# Altium PCB PCB1.PcbDoc
Units mil, origin at the board's own origin, x right, y up, seen from the top; angles counter-clockwise.
Board outline 740 x 2460 mil, 2 copper layers (Top Layer, Bottom Layer), stack 64.961 mil thick; 3 components, 47 nets, 97 pads, 0 vias.
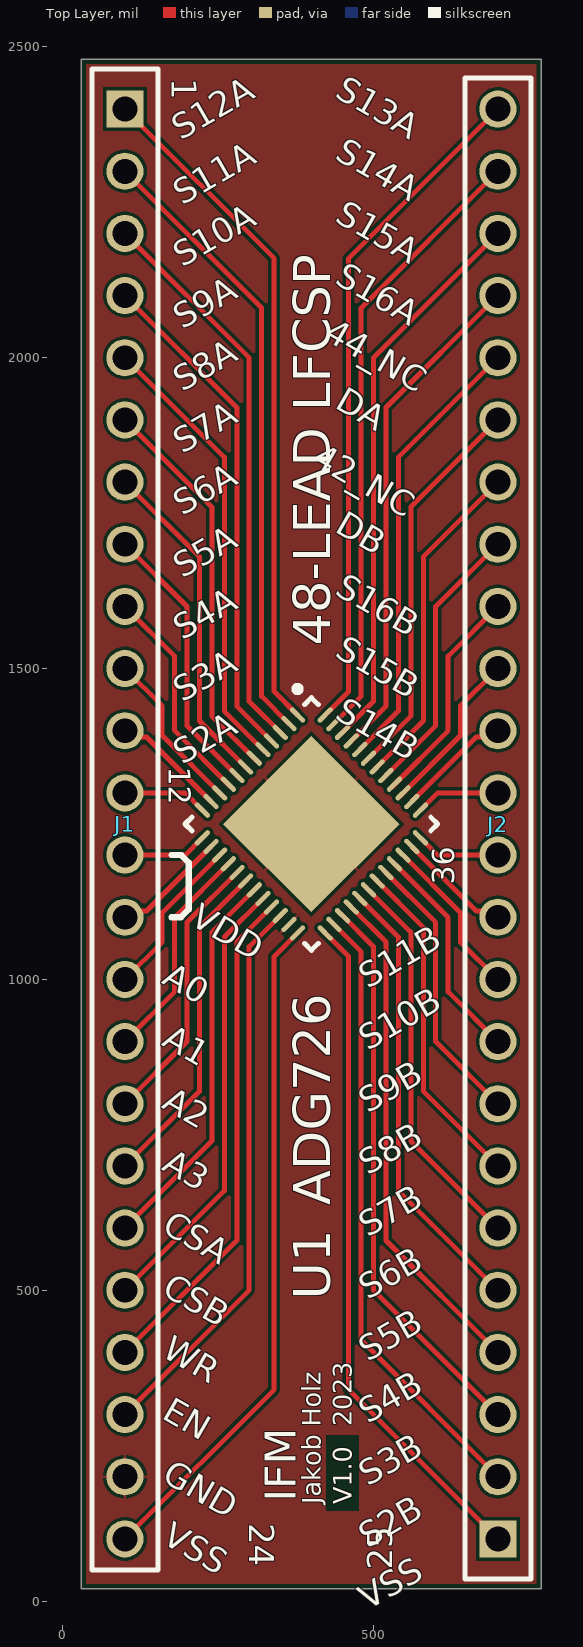
[diagram p0: Top Layer view]
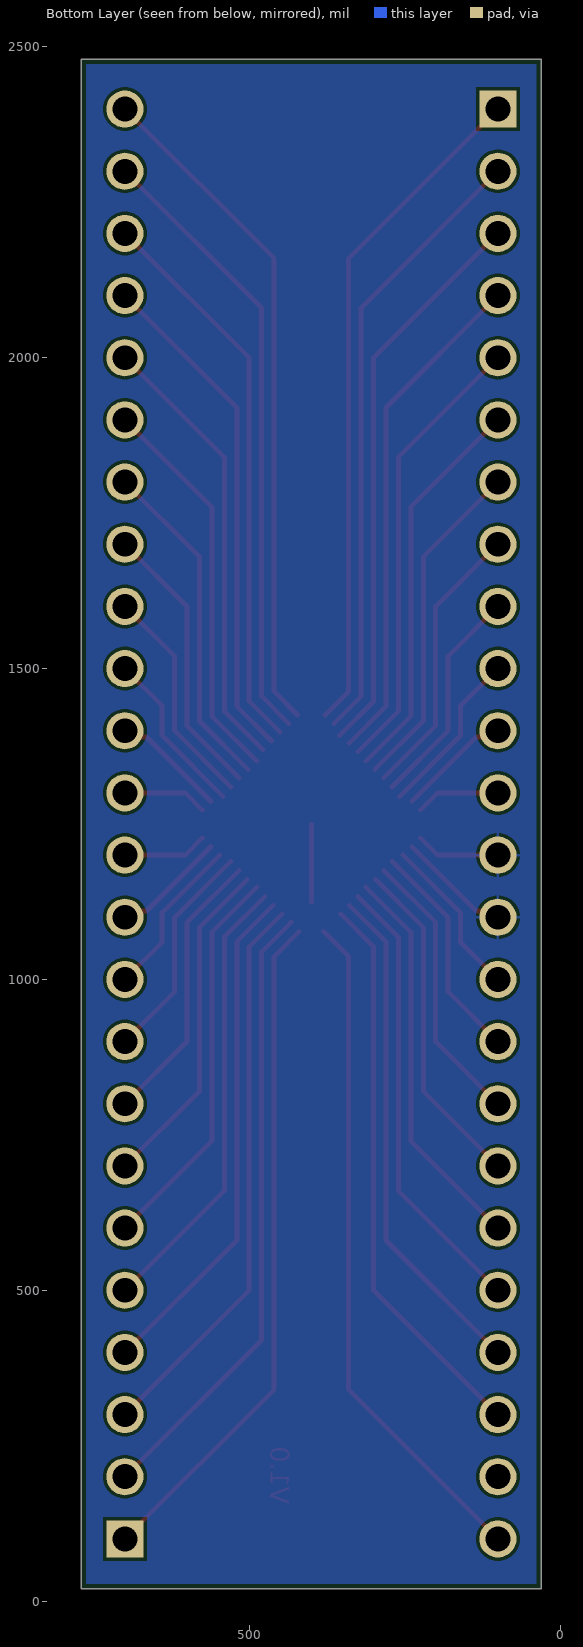
[diagram p1: Bottom Layer view, seen from below]

## Layer stack, top to bottom
Top Solder: solder mask 0.5, Solder Resist, Dk 3.8
Top Layer: signal copper 2.9528
Dielectric: core 59.0551, FR-4, Dk 4.5
Bottom Layer: signal copper 2.9528
Bottom Solder: solder mask 0.5, Solder Resist, Dk 3.8

## Board outline
30,20 770,20 770,2480 30,2480

## Design rules (kind name [scope] priority, off if disabled: settings)
BoardOutlineClearance [All] p1: gap=7.87 ignorepadtopadclearanceinfootprint=FALSE
Clearance [All] p1: gap=5 ignorepadtopadclearanceinfootprint=FALSE except(9.84: Arc-Hole Track-Hole SMDPad-Hole THPad-Hole Via-Hole Fill-Hole Poly-Hole Region-Hole Text-Hole)
ComponentClearance [All] p1: gap=5 collisioncheckmode=3 verticalgap=5 showdistances=TRUE
DiffPairsRouting [All] p1: maxlimit=10 minlimit=5 mostfreqgap=5 toplayer_minwidth=5 toplayer_maxwidth=1000 toplayer_prefwidth=5 bottomlayer_minwidth=5 bottomlayer_maxwidth=1000 bottomlayer_prefwidth=5 maxuncoupledlength=500
Height [All] p1: minheight=0 maxheight=71497.94 prefheight=500
HoleSize [All] p1: absolutevalues=TRUE maxlimit=248.03 minlimit=11.81 maxpercent=80.000 minpercent=20.000
HoleToHoleClearance [All] p1: gap=9.84 allowstackedmicrovias=FALSE
MinimumAnnularRing [All] p1: minimumring=3
MinimumSolderMaskSliver [All] p1: minsoldermaskwidth=0
PlaneClearance [All] p1: clearance=5
PlaneConnect PlaneConnectPowerPads [InPadClass('PowerPads')] p1: planeconnectstyle=Direct reliefexpansion=20 reliefentries=4 reliefconductorwidth=10 reliefairgap=10
PlaneConnect [All] p2: pad.planeconnectstyle=Relief pad.reliefexpansion=11.81 pad.reliefentries=4 pad.reliefconductorwidth=5 pad.reliefairgap=5 via.planeconnectstyle=Direct via.reliefexpansion=11.81 via.reliefentries=4 via.reliefconductorwidth=5 via.reliefairgap=5
PolygonConnect PolygonConnectPowerPads [All vs (InPadClass('PowerPads'))] p1: connectstyle=Direct reliefconductorwidth=10 reliefentries=4 polygonreliefangle="90 Angle" airgapwidth=10
PolygonConnect [All] p2: thpad.connectstyle=Relief thpad.reliefconductorwidth=5 thpad.reliefentries=4 thpad.polygonreliefangle="90 Angle" thpad.airgapwidth=5 smdpad.connectstyle=Relief smdpad.reliefconductorwidth=5 smdpad.reliefentries=4 smdpad.polygonreliefangle="90 Angle" smdpad.airgapwidth=5 via.connectstyle=Direct via.reliefconductorwidth=5 via.reliefentries=4 via.polygonreliefangle="90 Angle" via.airgapwidth=5
RoutingVias [All] p1: holewidth=11.81 width=23.62 viastyle="Through Hole" minholewidth=11.81 minwidth=23.62 maxholewidth=23.62 maxwidth=259.84
SilkToSilkClearance [All] p1: silktosilkclearance=0
SilkToSolderMaskClearance [IsPad] p1: minsilkscreentomaskgap=5 clearancetoexposedcopper=TRUE
SolderMaskExpansion [All] p1: expansion=2.95 istentingtop=FALSE
Width [All] p1: maxlimit=1000 minlimit=5 preferedwidth=5 minimp=50.000000 maximp=50.000000 favimp=50.000000
20 further rules are at their usual default settings.

## Components (designator, comment, footprint, x,y, rotation, side; value= is the part's Value field where it differs from the comment)
J1 "61303211821" 61303211821 100,2400 r270 top
J2 "61303211821" 61303211821 700,100 r90 top
U1 "ADG726BCPZ" ADI-CP-48-1_M 400,1250 r315 top

## Footprints (in the part's own frame and the unit in brackets; to place one, negate y for a bottom-side part, rotate by r counter-clockwise, add the part's x,y. Pads: shape width x height; smd on the part's side, far side on the other; paste and mask are expansions set on the pad)
61303211821 [mm] "Socket Header, Pitch 2.54 mm, THT, Vertical, single row, 32p"
  rect 1.52x1.52 hole 1.02: 1(0,0)
  round 1.52 hole 1.02: 2(2.54,0) 3(5.08,0) 4(7.62,0) 5(10.16,0) 6(12.7,0) 7(15.24,0) 8(17.78,0) 9(20.32,0) 10(22.86,0) 11(25.4,0) 12(27.94,0) 13(30.48,0) 14(33.02,0) 15(35.56,0) 16(38.1,0) 17(40.64,0) 18(43.18,0) 19(45.72,0) 20(48.26,0) 21(50.8,0) 22(53.34,0) 23(55.88,0) 24(58.42,0)
  silkscreen extent -1.65,-1.35 59.69,1.35
ADI-CP-48-1_M [mm] "QFN, 48-Leads, Body 7x7mm, Pitch 0.5mm, IPC Low Density"
  oval 0.8x0.2 smd: 1(-3.55,2.75) 2(-3.55,2.25) 3(-3.55,1.75) 4(-3.55,1.25) 5(-3.55,0.75) 6(-3.55,0.25) 7(-3.55,-0.25) 8(-3.55,-0.75) 9(-3.55,-1.25) 10(-3.55,-1.75) 11(-3.55,-2.25) 12(-3.55,-2.75) 25(3.55,-2.75) 26(3.55,-2.25) 27(3.55,-1.75) 28(3.55,-1.25) 29(3.55,-0.75) 30(3.55,-0.25) 31(3.55,0.25) 32(3.55,0.75) 33(3.55,1.25) 34(3.55,1.75) 35(3.55,2.25) 36(3.55,2.75)
  oval 0.2x0.8 smd: 13(-2.75,-3.55) 14(-2.25,-3.55) 15(-1.75,-3.55) 16(-1.25,-3.55) 17(-0.75,-3.55) 18(-0.25,-3.55) 19(0.25,-3.55) 20(0.75,-3.55) 21(1.25,-3.55) 22(1.75,-3.55) 23(2.25,-3.55) 24(2.75,-3.55) 37(2.75,3.55) 38(2.25,3.55) 39(1.75,3.55) 40(1.25,3.55) 41(0.75,3.55) 42(0.25,3.55) 43(-0.25,3.55) 44(-0.75,3.55) 45(-1.25,3.55) 46(-1.75,3.55) 47(-2.25,3.55) 48(-2.75,3.55)
  rect 5.1x5.1 smd: 49(0,0)
  silkscreen extent -4.42,-3.65 3.65,3.65, body extent -3.5,-3.5 3.5,3.5, height 1

## Part data
J1 J2: library part "Header 1x24", "THT Vertical Socket Header WR-PHD, Pitch 2.54 mm, Single Row, 32 pins", Contact Resistance=20mOhm, Manufacturer="Wurth Elektronik", Operating Temperature=-40to125degC, Rated Current=3A, Withstanding Voltage=500VAC, Working Voltage=250VAC, Datasheet URL=https://katalog.we-online.de/em/datasheet/6130xx11821.pdf, Gender=Female, Manufacturer URL=http://www.we-online.de, Mounting Technology=THT, Orientation=Vertical, Package Reference=61303211821, Packaging=Tray, Part Number=61303211821, Pin Number=32, Pitch=2.54mm, Publisher=WurthElektronik, Row Number=Single
U1: library part CMP-0798-00018-1, "1.8 to 5.5 V / +/-2.5 V, 4 Ohm, 16-Channel Analog Multiplexer, -40 to 85 degC, 48-pin QFN (CP-48-1), Tray", Manufacturer="Analog Devices", Bandwidth (Hz)=34M, Code_JEDEC=MO-220-VKKD-2, ComponentLink1Description="Manufacturer URL", ComponentLink1URL=http://www.analog.com/en/index.html, ComponentLink2Description=Datasheet, ComponentLink2URL=http://www.analog.com/static/imported-files/data_sheets/ADG726_732.pdf, ComponentLink3Description="Package Specification", ComponentLink3URL=http:/www.analog.com/static/imported-files/packages/PKG_PDF/LFCSP(CP)/CP-48/CP_48_1.pdf, DatasheetVersion="Rev. 0", Max Analog Signal Range="Vss to Vdd", Mounting Technology="Surface Mount", PackageDescription="48-Pin Lead Frame Chip Scale Package, Body 7 x 7 mm, Pitch 0.5 mm", PackageReference=CP-48-1, Packing=Tray, PartNumber=ADG726BCPZ, Ron (ohms)=4, Supply V Guar Performance="Dual_(+/-2.5V), Single_(+3V), Single_(+5V)", t transition (s)=23n

## Nets (pads, with @x,y where several pads share a name; then routed paths per layer and width w, separated by ;. In a path a pad name is that pad's centre, name@x,y a point inside that pad or via, vN(x,y) a via of type N, cw(c..) or ccw(c..) an arc to the next point about the centre after c; other vN are vias at no path point)
42_NC: J2.18 U1.42 | length 544
  Top Layer w8: U1.42@502.2,1337.95 580,1415.75 580,1680 J2.18
44_NC: J2.20 U1.44 | length 722.3
  Top Layer w8: U1.44 540,1431.76 540,1840 J2.20
A0: J1.15 U1.15 | length 263
  Top Layer w8: J1.15 160,1060 160,1107.44 U1.15
A1: J1.16 U1.16 | length 360.6
  Top Layer w8: J1.16 180,980 180,1099.6 U1.16@270.45,1190.04
A2: J1.17 U1.17 | length 450.9
  Top Layer w8: J1.17 200,900 200,1091.76 U1.17@283.24,1175
A3: J1.18 U1.18 | length 542.1
  Top Layer w8: J1.18 220,820 220,1083.92 U1.18@296.69,1160.61
CSA: J1.19 U1.19 | length 636.3
  Top Layer w8: J1.19 240,740 240,1076.08 U1.19@312.3,1148.38
CSB: J1.20 U1.20 | length 726.4
  Top Layer w8: J1.20 260,660 260,1068.24 U1.20@325,1133.24
DA: J2.19 U1.43 | length 637
  Top Layer w8: U1.43@487.44,1351.03 560,1423.59 560,1760 J2.19
DB: J2.17 U1.41 | length 451.7
  Top Layer w8: U1.41@516.4,1324.31 600,1407.91 600,1600 J2.17
EN: J1.22 U1.22 | length 910.3
  Top Layer w8: J1.22 300,500 300,1052.56 U1.22@352.93,1105.49
GND: J1.23 U1.23 U1.49 | length 125.3
  Top Layer w8: U1.49@400,1124.73 U1.49
S1A: J1.12 U1.12 | length 136.1
  Top Layer w8: J1.12 196.89,1300 U1.12
S1B: J2.1 U1.25 | length 1093.6
  Top Layer w8: U1.25@419.52,1077.37 460,1036.89 460,340 J2.1
S2A: J1.11 U1.11 | length 185.7
  Top Layer w8: J1.11 109.92,1390.08 134.64,1390.08 U1.11
S2B: J2.2 U1.26 | length 1002.9
  Top Layer w8: U1.26@432.59,1092.14 480,1044.72 480,420 J2.2
S3A: J1.10 U1.10 | length 271.5
  Top Layer w8: J1.10 160,1440 160,1392.24 U1.10@258.19,1294.05
S3B: J2.3 U1.27 | length 910.3
  Top Layer w8: U1.27@447.07,1105.49 500,1052.56 500,500 J2.3
S4A: J1.9 U1.9 | length 360.9
  Top Layer w8: J1.9 180,1520 180,1400.08 U1.9@270.43,1309.65
S4B: J2.4 U1.28 | length 818.3
  Top Layer w8: U1.28@461.09,1119.32 520,1060.4 520,580 J2.4
S5A: J1.8 U1.8 | length 451.7
  Top Layer w8: J1.8 200,1600 200,1407.91 U1.8@283.6,1324.31
S5B: J2.5 U1.29 | length 726.4
  Top Layer w8: U1.29@475,1133.24 540,1068.24 540,660 J2.5
S6A: J1.7 U1.7 | length 544
  Top Layer w8: J1.7 220,1680 220,1415.75 U1.7@297.8,1337.95
S6B: J2.6 U1.30 | length 636.3
  Top Layer w8: U1.30@487.7,1148.38 560,1076.08 560,740 J2.6
S7A: J1.6 U1.6 | length 637
  Top Layer w8: J1.6 240,1760 240,1423.59 U1.6@312.56,1351.03
S7B: J2.7 U1.31 | length 542.1
  Top Layer w8: U1.31@503.31,1160.61 580,1083.92 580,820 J2.7
S8A: J1.5 U1.5 | length 727
  Top Layer w8: J1.5 260,1840 260,1431.43 U1.5@325.18,1366.26
S8B: J2.8 U1.32 | length 450.9
  Top Layer w8: U1.32@516.76,1175 600,1091.76 600,900 J2.8
S9A: J1.4 U1.4 | length 819.1
  Top Layer w8: J1.4 280,1920 280,1439.27 U1.4@339.28,1379.99
S9B: J2.9 U1.33 | length 360.6
  Top Layer w8: U1.33@529.55,1190.04 620,1099.6 620,980 J2.9
S10A: J1.3 U1.3 | length 912.8
  Top Layer w8: J1.3 300,2000 300,1447.11 U1.3@354.51,1392.6
S10B: J2.10 U1.34 | length 263
  Top Layer w8: U1.34 640,1107.44 640,1060 J2.10
S11A: J1.2 U1.2 | length 997.8
  Top Layer w8: J1.2 320,2080 320,1455.28 U1.2
S11B: J2.11 U1.35 | length 185.7
  Top Layer w8: U1.35 665.36,1109.92 690.08,1109.92 J2.11
S12A: J1.1 U1.1 | length 1089.7
  Top Layer w8: J1.1 340,2160 340,1463.11 U1.1
S12B: J2.12 U1.36 | length 136.1
  Top Layer w8: U1.36 603.11,1200 J2.12
S13A: J2.24 U1.48 | length 1089.7
  Top Layer w8: U1.48 460,1463.11 460,2160 J2.24
S13B: J2.13 U1.37 | length 136.1
  Top Layer w8: U1.37 603.11,1300 J2.13
S14A: J2.23 U1.47 | length 997.8
  Top Layer w8: U1.47 480,1455.28 480,2080 J2.23
S14B: J2.14 U1.38 | length 185.7
  Top Layer w8: U1.38 665.36,1390.08 690.08,1390.08 J2.14
S15A: J2.22 U1.46 | length 906
  Top Layer w8: U1.46 500,1447.44 500,2000 J2.22
S15B: J2.15 U1.39 | length 271.5
  Top Layer w8: U1.39@541.81,1294.05 640,1392.24 640,1440 J2.15
S16A: J2.21 U1.45 | length 814.1
  Top Layer w8: U1.45 520,1439.6 520,1920 J2.21
S16B: J2.16 U1.40 | length 360.9
  Top Layer w8: U1.40@529.57,1309.65 620,1400.08 620,1520 J2.16
VDD: J1.13 J1.14 U1.13 U1.14 | length 321.8
  Top Layer w8: J1.14 109.92,1109.92 134.64,1109.92 U1.14 ; J1.13 196.89,1200 U1.13
VSS: J1.24 U1.24 | length 1093.6
  Top Layer w8: J1.24 340,340 340,1036.89 U1.24@380.48,1077.37
WR: J1.21 U1.21 | length 818.3
  Top Layer w8: J1.21 280,580 280,1060.4 U1.21@338.91,1119.32

## Polygon pours and split planes (outlines as drawn)
VDD on Bottom Layer "VDD_L02_P001" (solid, pour order 1): 0,0 0,2500 800,2500 800,0
GND on Top Layer "GND_L01_P000" (solid, pour order 0): 1.05,0 0,2500 800,2500 800,0

## Other copper
Top Layer:
  text "V1.0" at 464.99,156 h30 r90

## Silkscreen, mask and mechanical layers (free items; w line width, h text height)
Top Overlay:
  lines w10: 175,1100 190.09,1100 202.72,1112.63 202.72,1187.88 190.6,1200 175,1200
  text "S13A" at 435.89,2420.68 h40 r330
  text "S12A" at 190,2349.02 h40 r30
  text "S14A" at 435.89,2320.68 h40 r330
  text "S11A" at 192.5,2244.7 h40 r30
  text "S15A" at 435.89,2220.68 h40 r330
  text "S10A" at 192.5,2144.7 h40 r30
  text "S16A" at 435.89,2120.68 h40 r330
  text "S9A" at 192.5,2044.7 h40 r30
  text "44_NC" at 418.58,2030.68 h40 r330
  text "S8A" at 192.5,1944.7 h40 r30
  text "DA" at 435.89,1920.68 h40 r330
  text "S7A" at 192.5,1844.7 h40 r30
  text "42_NC" at 398.71,1829.46 h40 r330
  text "S6A" at 192.5,1744.7 h40 r30
  text "DB" at 435.89,1720.68 h40 r330
  text "S5A" at 192.5,1644.7 h40 r30
  text "S16B" at 435.89,1620.68 h40 r330
  text "S4A" at 192.5,1544.7 h40 r30
  text "48-LEAD LFCSP" at 429.99,1537 h60 r90
  text "S15B" at 435.89,1520.68 h40 r330
  text "S3A" at 192.5,1444.7 h40 r30
  text "S14B" at 435.89,1420.68 h40 r330
  text "S2A" at 192.5,1344.7 h40 r30
  text "VDD" at 202.5,1089.7 h40 r330
  text "A0" at 157.5,994.7 h40 r330
  text "S11B" at 490.88,984.07 h40 r30
  text "A1" at 157.5,894.7 h40 r330
  text "S10B" at 490.88,884.07 h40 r30
  text "A2" at 157.5,794.7 h40 r330
  text "S9B" at 490.88,784.07 h40 r30
  text "A3" at 157.5,694.7 h40 r330
  text "S8B" at 490.88,684.07 h40 r30
  text "ADG726" at 429.99,637 h60 r90
  text "CSA" at 157.5,594.7 h40 r330
  text "S7B" at 490.88,584.07 h40 r30
  text "CSB" at 157.5,494.7 h40 r330
  text "S6B" at 490.88,484.07 h40 r30
  text "WR" at 157.5,394.7 h40 r330
  text "S5B" at 490.88,384.07 h40 r30
  text "EN" at 157.5,294.7 h40 r330
  text "S4B" at 490.88,284.07 h40 r30
  text "2023" at 465,281 h30 r90
  text "GND" at 157.5,194.7 h40 r330
  text "S3B" at 490.88,184.07 h40 r30
  text "IFM" at 374.99,160 h50 r90
  text "Jakob Holz" at 415,156 h30 r90
  text "V1.0" at 465,156 h30 r90
  text "VSS" at 157.5,94.7 h40 r330
  text "S2B" at 490.88,84.07 h40 r30
  text "25" at 529.99,50 h40 r90
  text "VSS" at 490.88,-15.93 h40 r30

## Text inside footprints (layer, text, board x,y; h text height)
J1: Top Overlay "1" at 175,2450 h40 r270; Top Overlay "12" at 170.95,1341.96 h35 r270; Top Overlay "24" at 300,125 h40 r270
J2: Top Overlay "36" at 629.69,1152.05 h35 r90